# Altium PCB PCB.PcbDoc (part 1 of 2)
Units mil, origin at the board's own origin, x right, y up, seen from the top; angles counter-clockwise.
Board outline 1268 x 1338 mil, 4 copper layers (Top Layer, GND, POWER, Bottom Layer), stack 45.84 mil thick; 109 components, 101 nets, 461 pads, 146 vias.
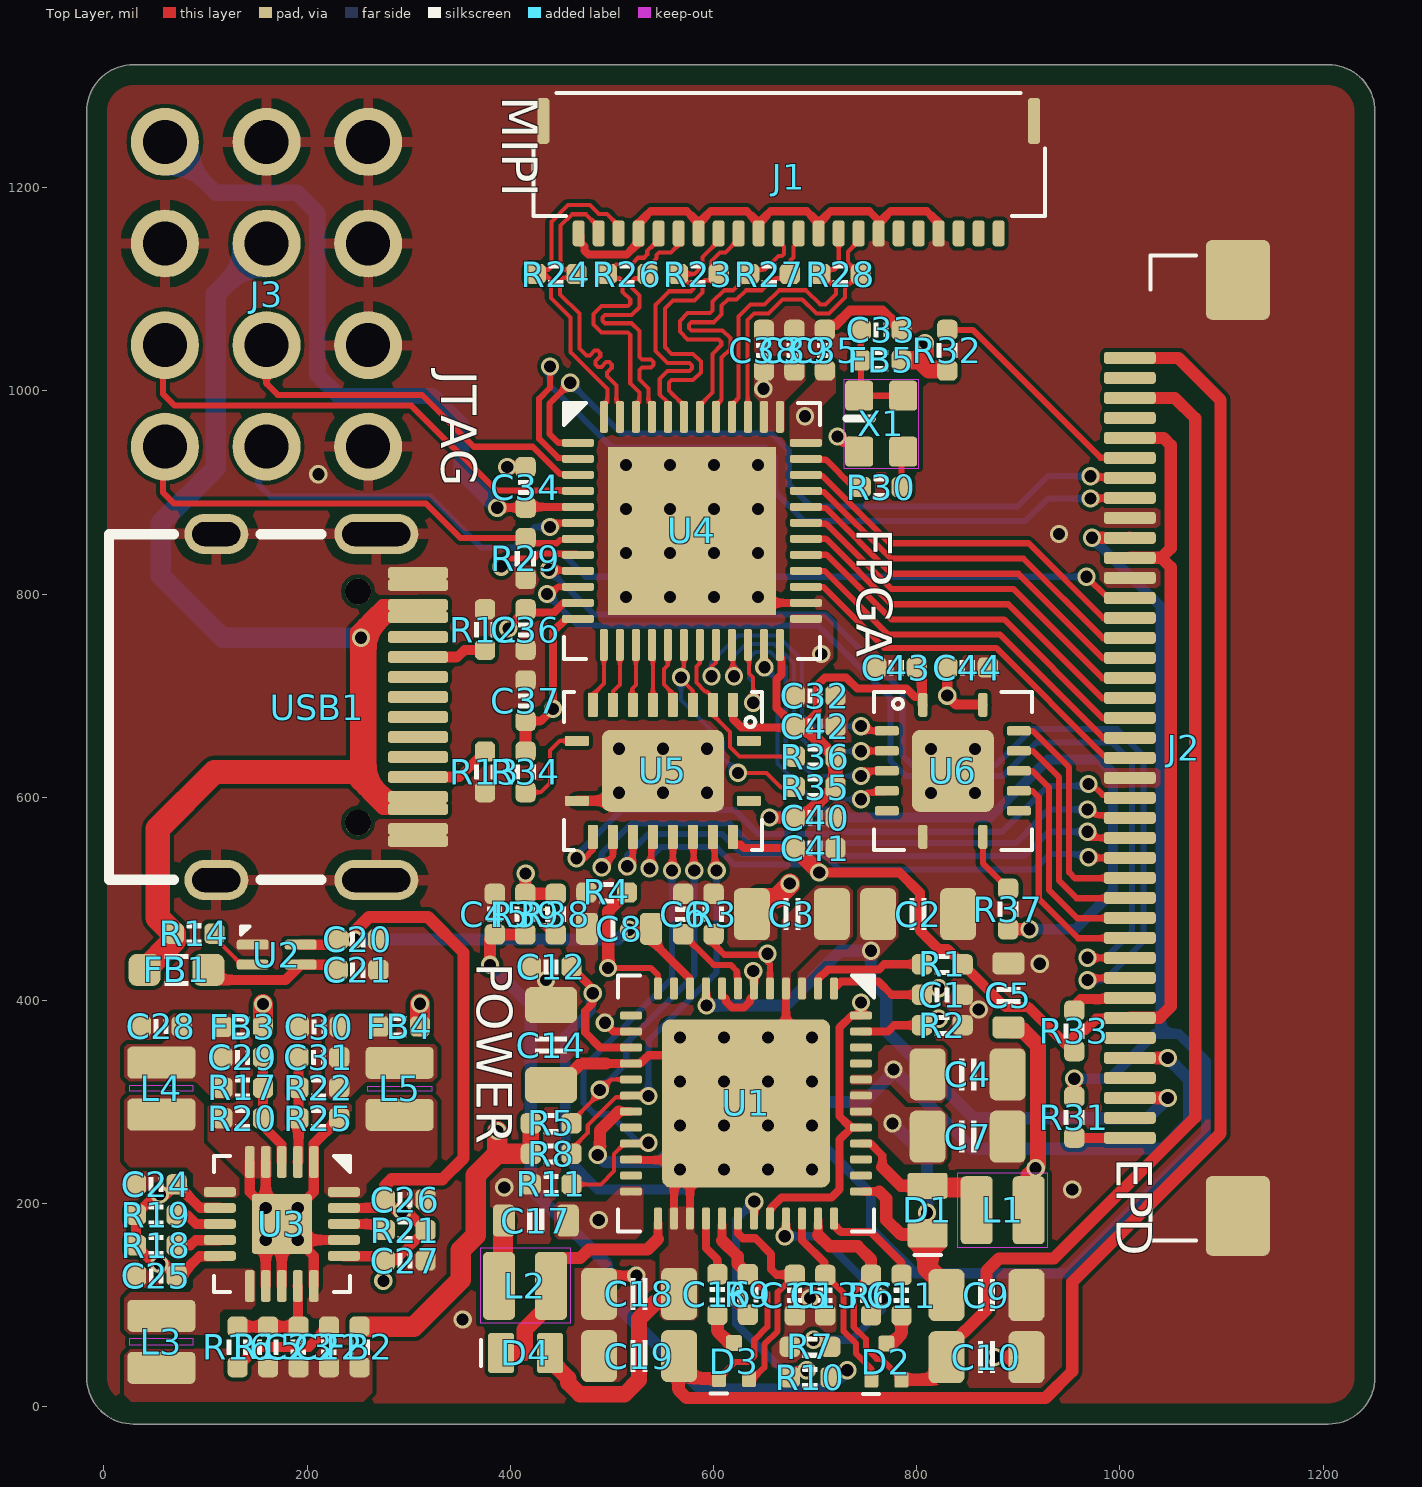
[diagram p0: Top Layer view]
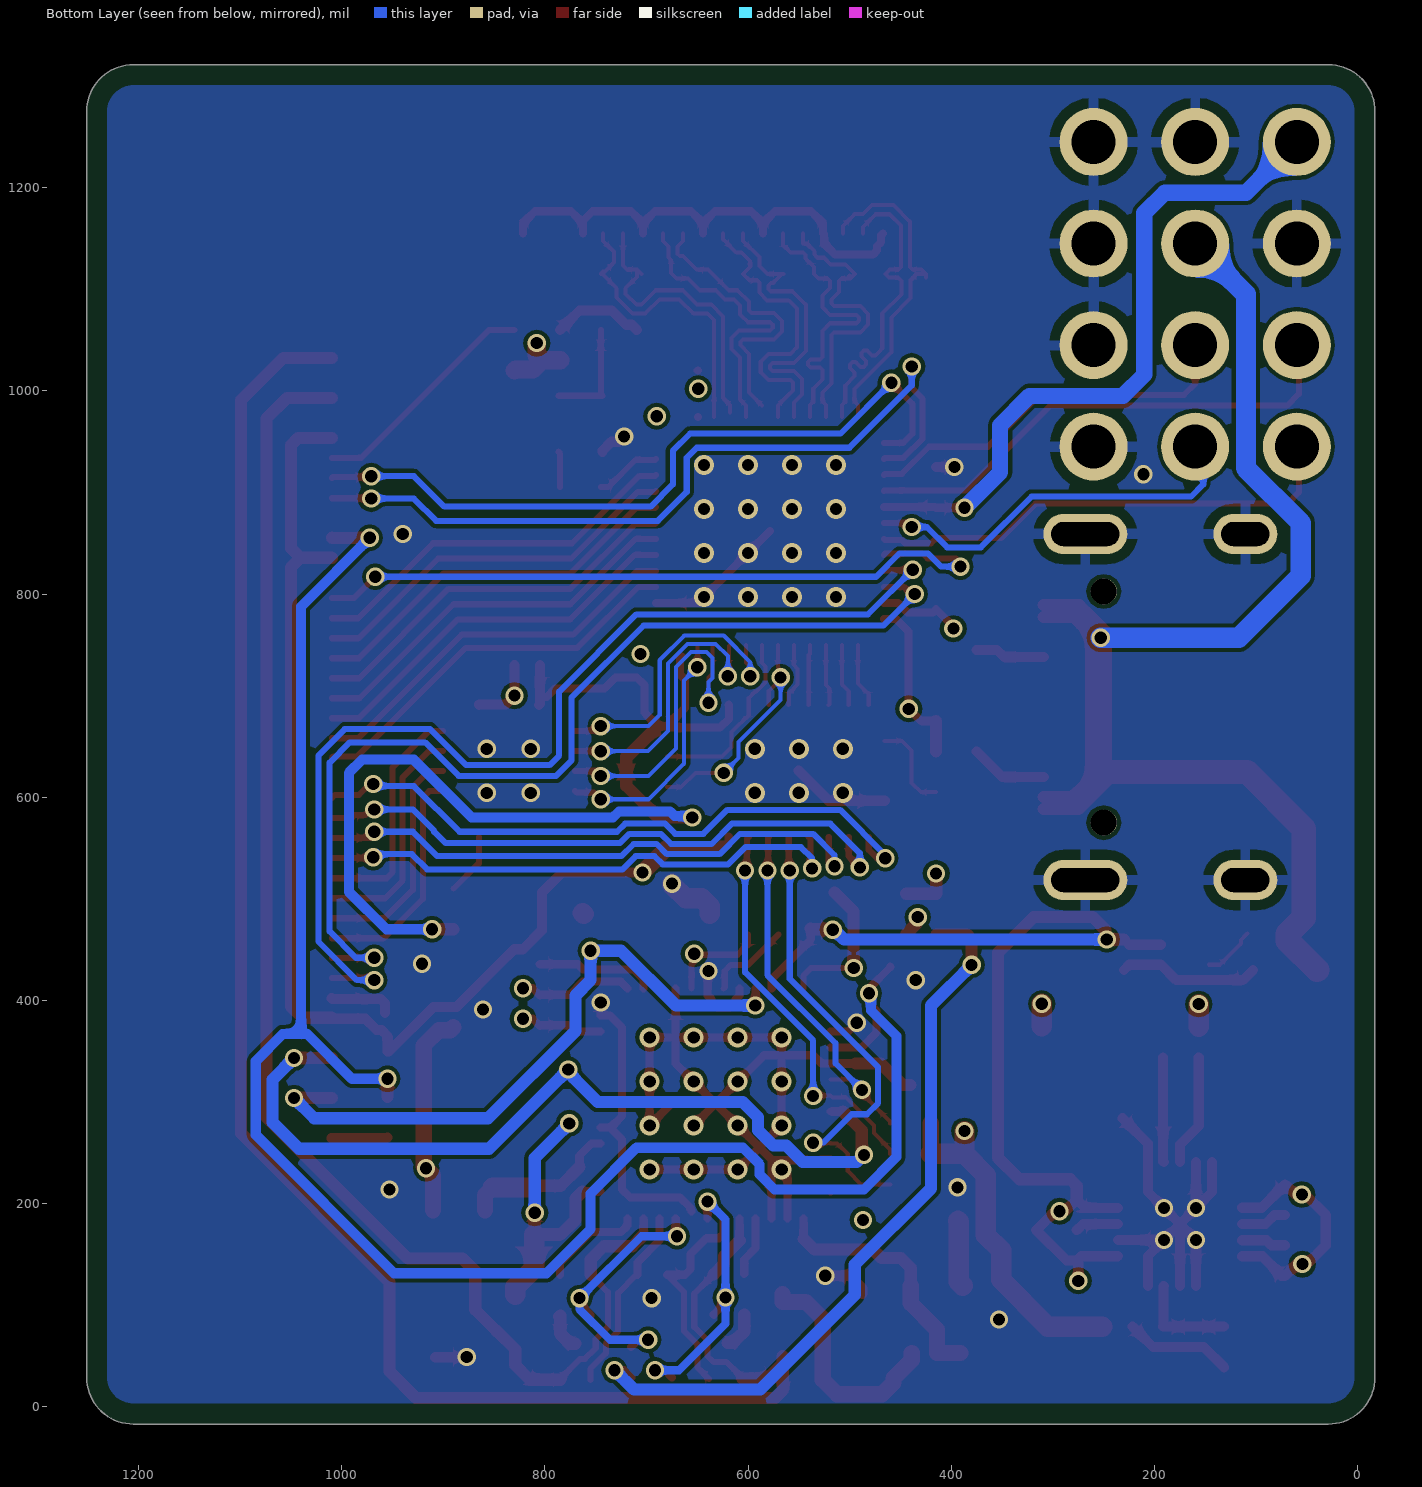
[diagram p1: Bottom Layer view, seen from below]
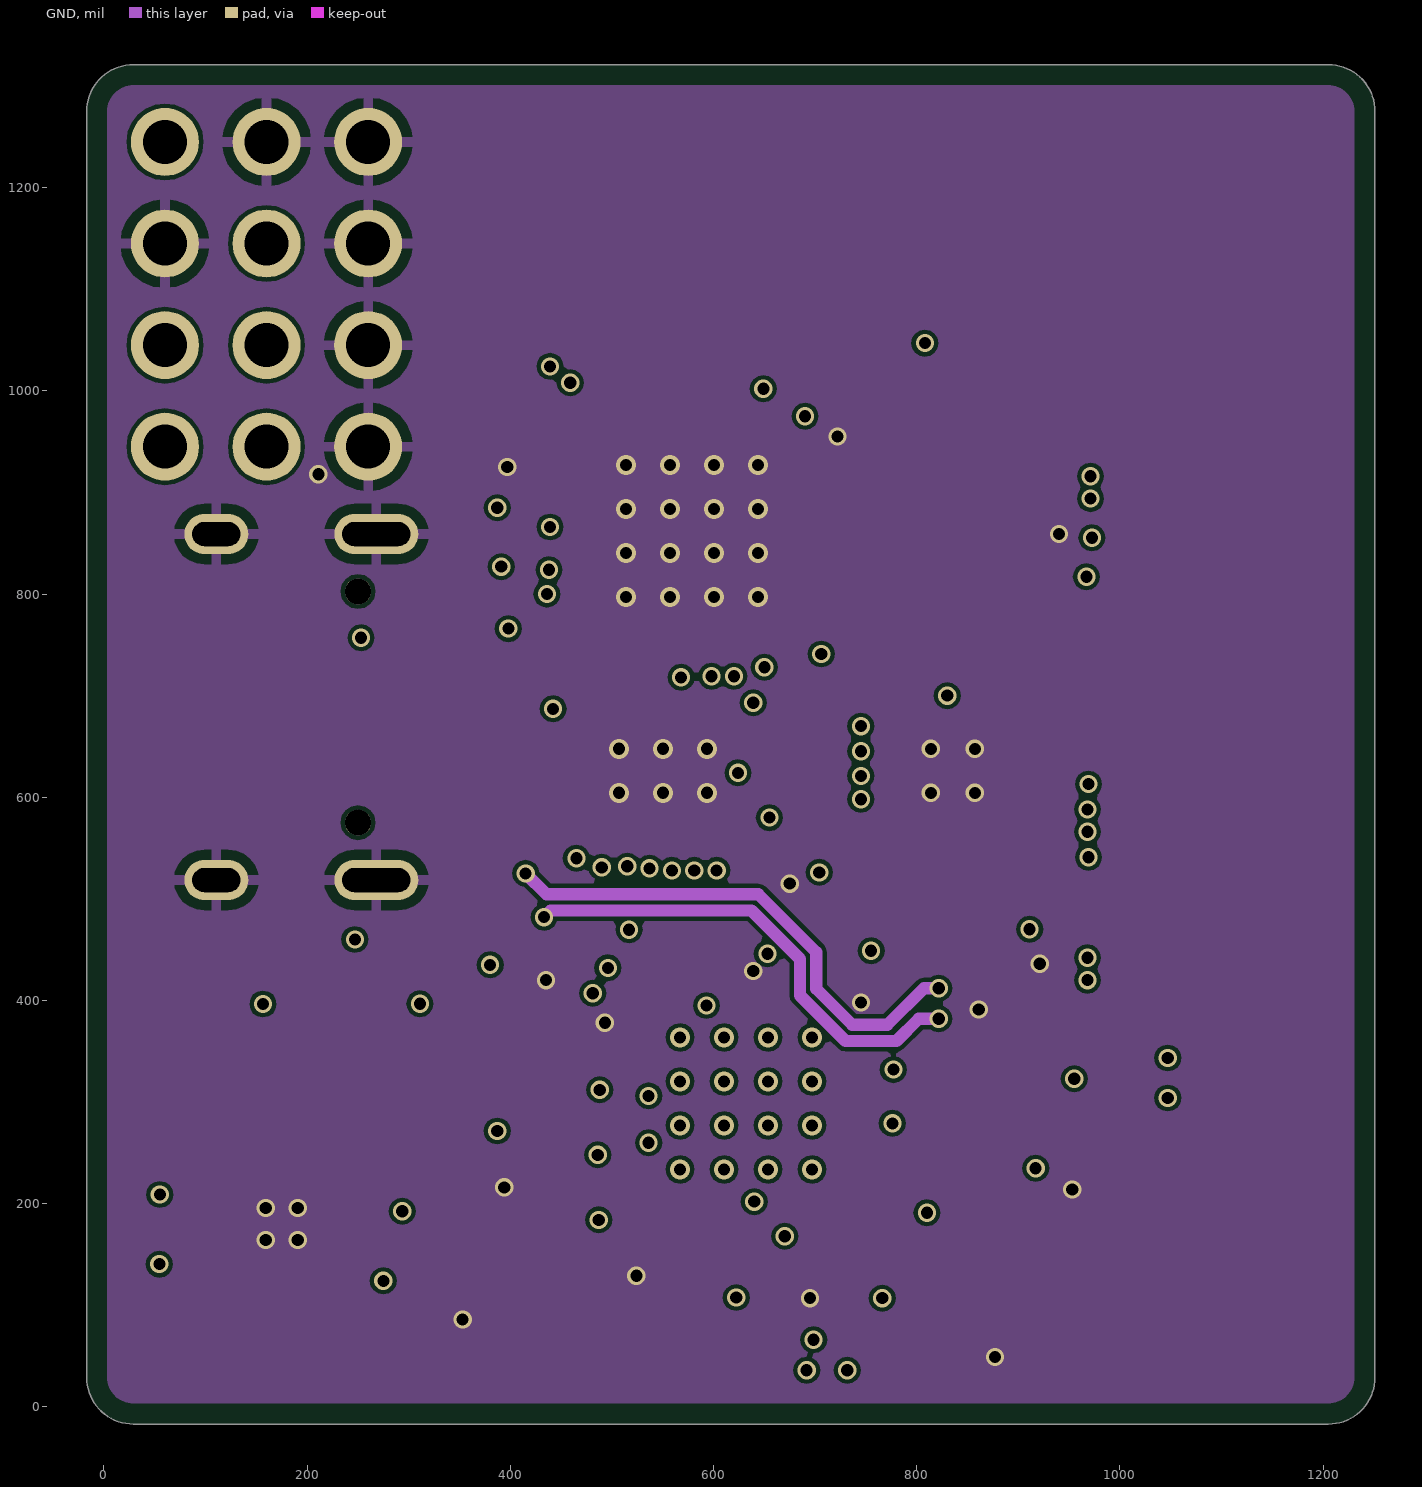
[diagram p2: GND]
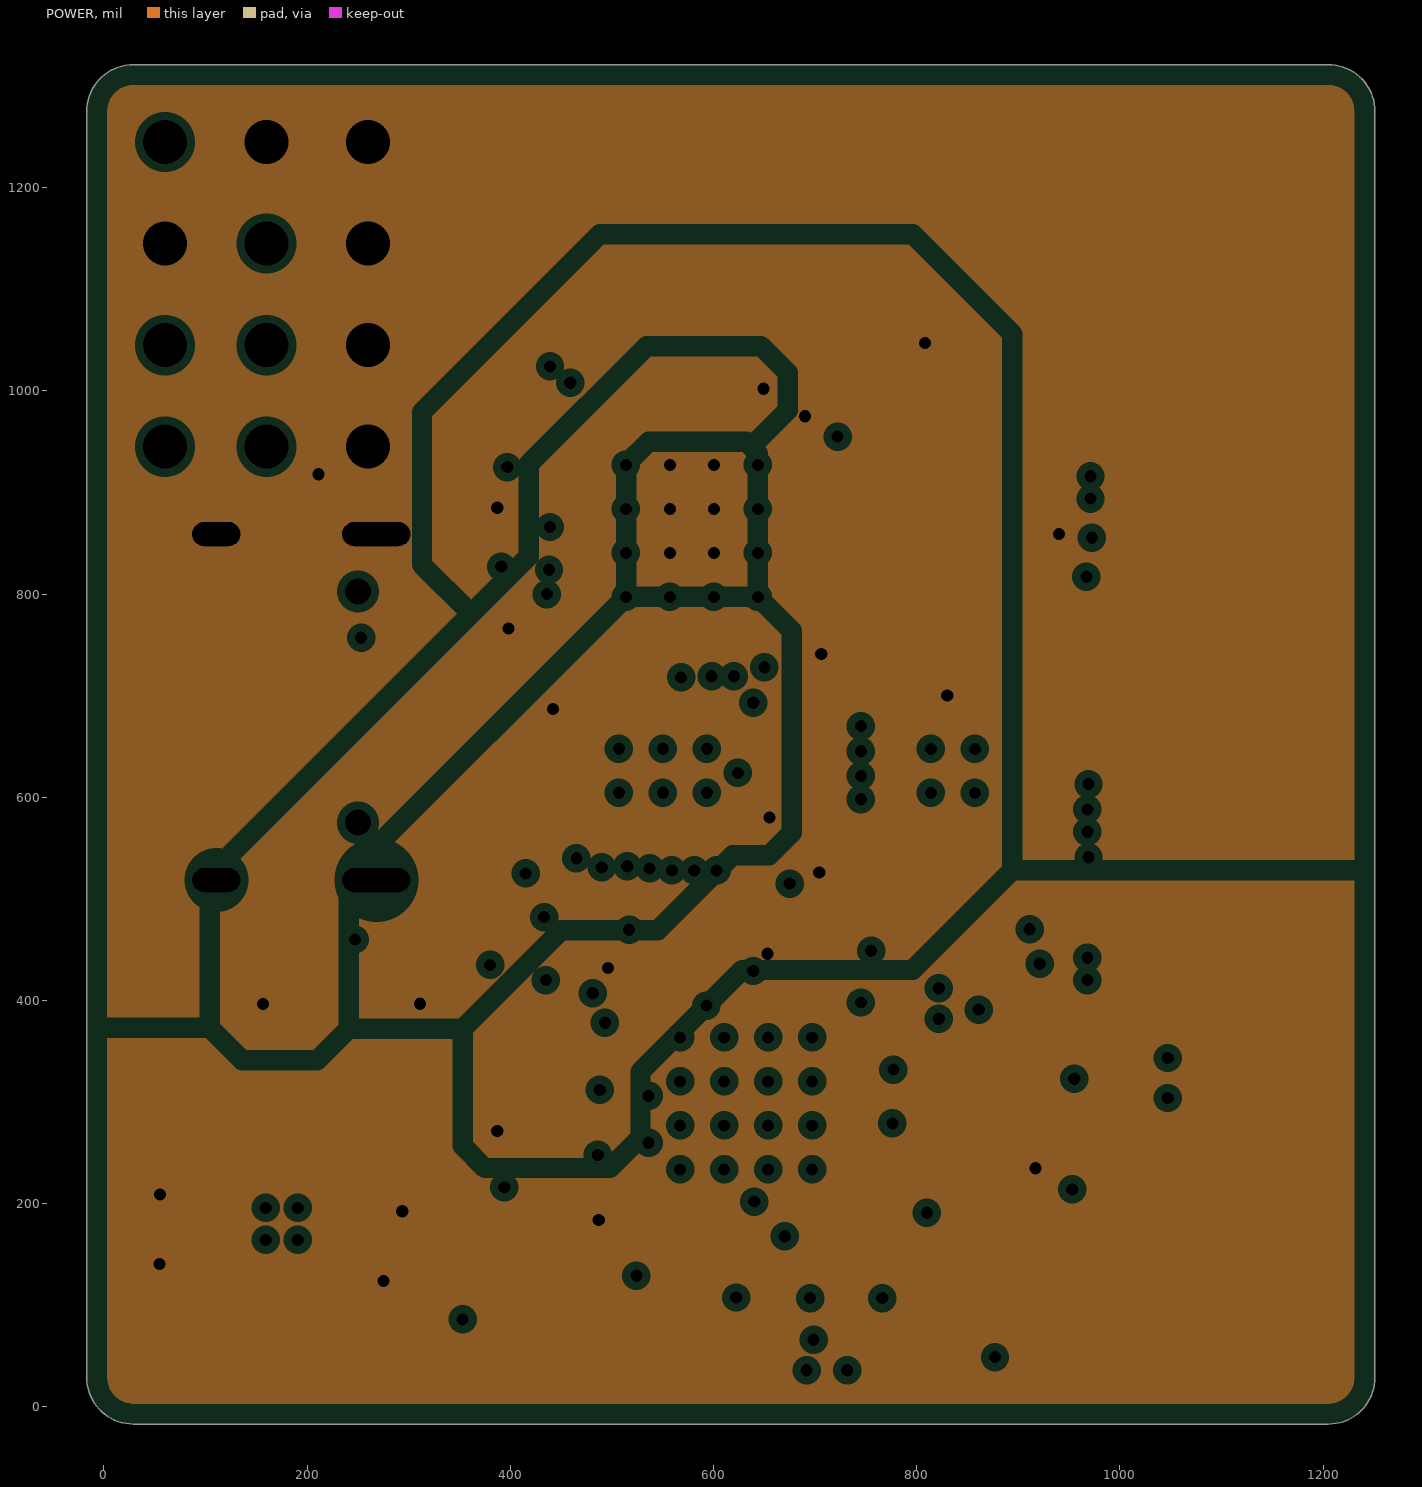
[diagram p3: POWER, clearances drawn from the general rule]
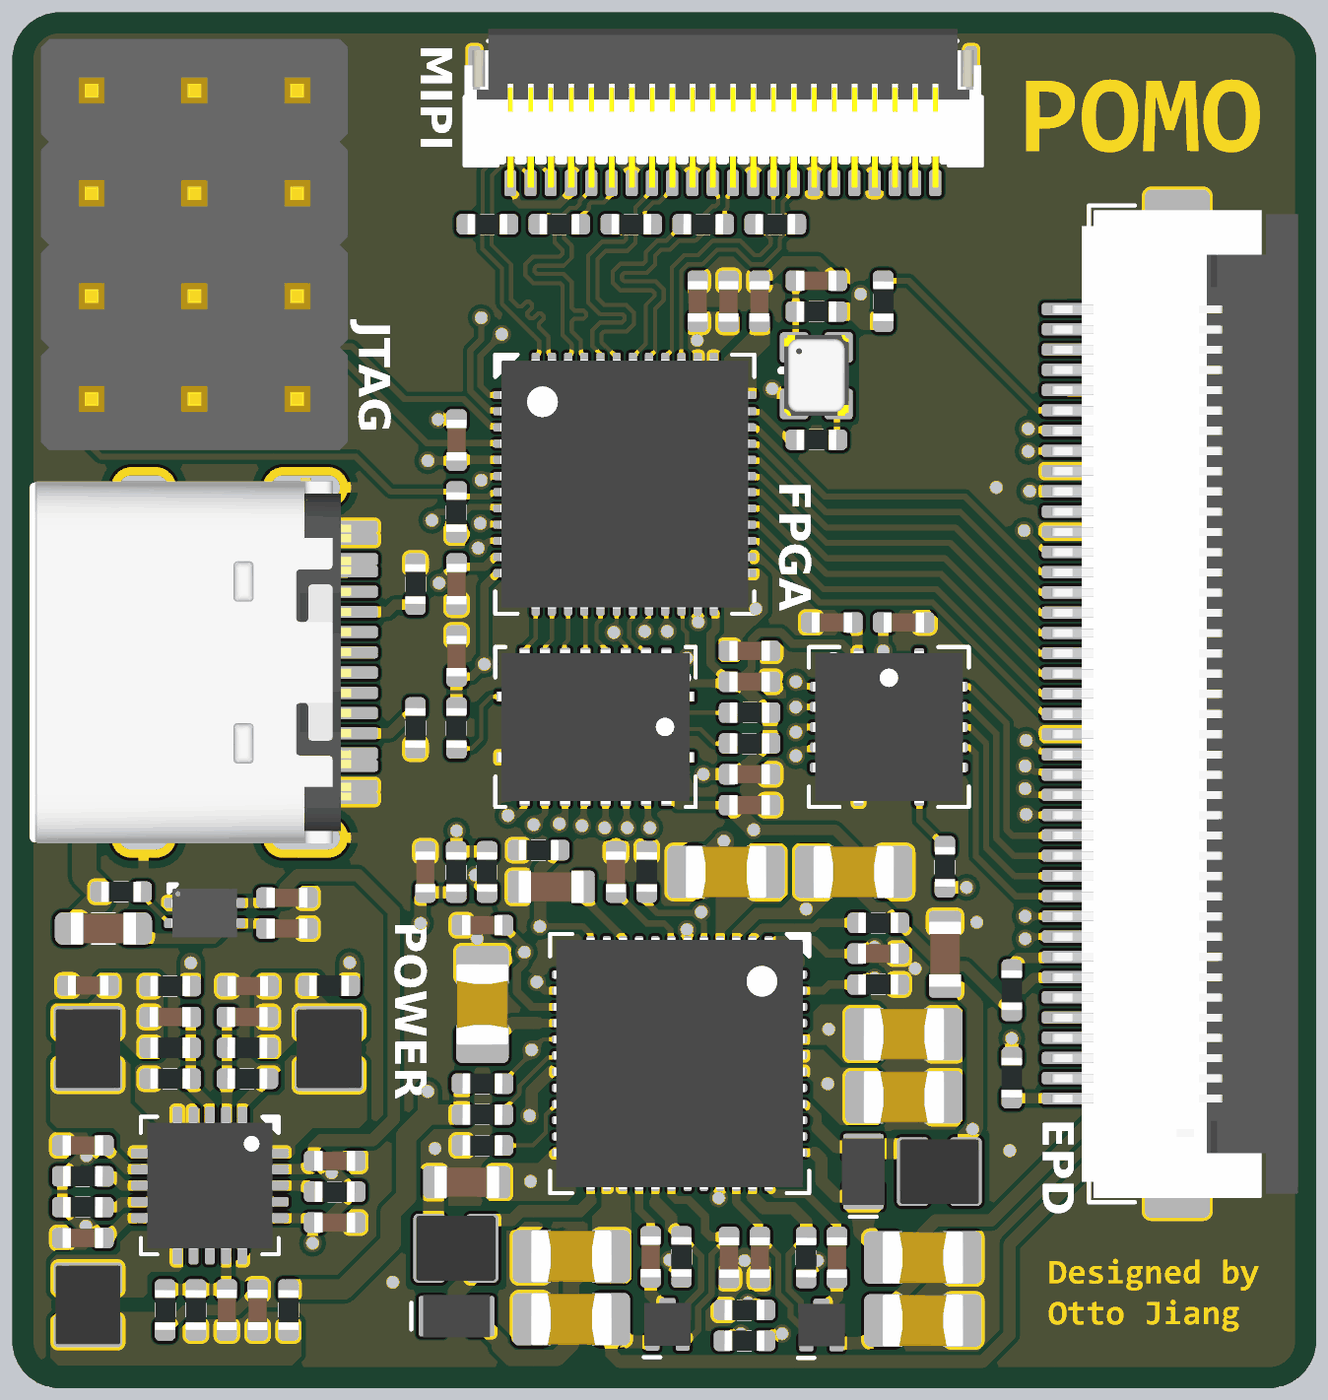
[diagram p5: 3D render of the assembled board from above, using the file's embedded part models]

## Layer stack, top to bottom
Top Solder: solder mask 0.4, Solder Resist, Dk 3.5
Top Layer: signal copper 1.3798
Dielectric 2: prepreg 3.91, PP-006, Dk 4.1
GND: signal copper 0.6
Dielectric 1: dielectric 34.06, FR-4, Dk 4.8
POWER: plane copper 0.6, net (Multiple Nets)
Dielectric 3: prepreg 3.91, PP-006, Dk 4.1
Bottom Layer: signal copper 1.3798
Bottom Solder: solder mask 0.4, Solder Resist, Dk 3.5

## Board outline
-17,29 ccw(c29,29) 29,-17 1205,-17 ccw(c1205,29) 1251,29 1251,1275 ccw(c1205,1275) 1205,1321 29,1321 ccw(c29,1275) -17,1275

## Design rules (kind name [scope] priority, off if disabled: settings)
BoardOutlineClearance [All] p1: gap=4 ignorepadtopadclearanceinfootprint=FALSE except(0: Track-OutlineEdge Track-CavityEdge Track-CutoutEdge Track-SplitBarrior Track-SplitContinuation Text-OutlineEdge Text-CavityEdge Text-CutoutEdge Text-SplitBarrior Text-SplitContinuation; 20: Poly-OutlineEdge)
Clearance [All] p1: gap=4 ignorepadtopadclearanceinfootprint=FALSE
ComponentClearance [All] p1: gap=4 collisioncheckmode=3 verticalgap=0 showdistances=FALSE
DiffPairsRouting MIPI [InDifferentialPairClass('All Differential Pairs')] p1: maxlimit=7 minlimit=5 mostfreqgap=5 toplayer_minwidth=4 toplayer_maxwidth=4 toplayer_prefwidth=4 midlayer1_minwidth=4 midlayer1_maxwidth=4 midlayer1_prefwidth=4 bottomlayer_minwidth=4 bottomlayer_maxwidth=4 bottomlayer_prefwidth=4 maxuncoupledlength=500
FanoutControl Fanout_BGA [All] p1: bgadir=Out bgaviamode=Centered fanoutstyle=Auto fanoutdirection=Alternating viagrid=1 // Fanout_BGA (Default Rule)
HoleSize [All] p1: absolutevalues=TRUE maxlimit=10000 minlimit=12 maxpercent=80.000 minpercent=20.000
MatchedLengths MatchedLengths_ADDR [InNetClass('LPDDR4-ADDR')] p1 off: tolerance=10 checknetsindiffpair=FALSE checkdiffpairvsdiffpair=TRUE checkxsignals=TRUE checkothers=TRUE
MatchedLengths MatchedLengths_A_HIGH [InNetClass('LPDDR4-A-D8-D15')] p2 off: tolerance=10 checknetsindiffpair=FALSE checkdiffpairvsdiffpair=TRUE checkxsignals=TRUE checkothers=TRUE
MatchedLengths MatchedLengths_A_LOW [InNetClass('LPDDR4-A-D0-D7')] p3 off: tolerance=10 checknetsindiffpair=FALSE checkdiffpairvsdiffpair=TRUE checkxsignals=TRUE checkothers=TRUE
MatchedLengths MatchedLengths_B_HIGH [InNetClass('LPDDR4-B-D8-D15')] p4 off: tolerance=10 checknetsindiffpair=FALSE checkdiffpairvsdiffpair=TRUE checkxsignals=TRUE checkothers=TRUE
MatchedLengths MatchedLengths_B_LOW [InNetClass('LPDDR4-B-D0-D7')] p5 off: tolerance=10 checknetsindiffpair=FALSE checkdiffpairvsdiffpair=TRUE checkxsignals=TRUE checkothers=TRUE
MatchedLengths MatchedLengths_EMMC [InNetClass('EMMC')] p6 off: tolerance=50 checknetsindiffpair=FALSE checkdiffpairvsdiffpair=TRUE checkxsignals=TRUE checkothers=TRUE
MatchedLengths MatchedLengths_SD [InNetClass('SD')] p7 off: tolerance=50 checknetsindiffpair=FALSE checkdiffpairvsdiffpair=TRUE checkxsignals=TRUE checkothers=TRUE
MatchedLengths MatchedLengths_WIFI [InNetClass('WIFI-SDC')] p8 off: tolerance=50 checknetsindiffpair=FALSE checkdiffpairvsdiffpair=TRUE checkxsignals=TRUE checkothers=TRUE
MatchedLengths MatchedLengths_TF [InNetClass('TF')] p9 off: tolerance=50 checknetsindiffpair=FALSE checkdiffpairvsdiffpair=TRUE checkxsignals=TRUE checkothers=TRUE
MinimumSolderMaskSliver [All] p1 off: minsoldermaskwidth=2
PlaneClearance [All] p1: clearance=8
PlaneConnect [All] p1: planeconnectstyle=Direct reliefexpansion=20 reliefentries=4 reliefconductorwidth=10 reliefairgap=10
PolygonConnect [All] p1: thpad.connectstyle=Relief thpad.reliefconductorwidth=10 thpad.reliefentries=4 thpad.polygonreliefangle="90 Angle" thpad.airgapwidth=10 smdpad.connectstyle=Direct smdpad.reliefconductorwidth=10 smdpad.reliefentries=4 smdpad.polygonreliefangle="90 Angle" smdpad.airgapwidth=10 via.connectstyle=Direct via.reliefconductorwidth=10 via.reliefentries=4 via.polygonreliefangle="90 Angle" via.airgapwidth=10
RoutingVias [All] p1: holewidth=12 width=18 viastyle="Through Hole" minholewidth=12 minwidth=18 maxholewidth=28 maxwidth=50
SilkToSilkClearance [All] p1: silktosilkclearance=0
SilkToSolderMaskClearance [IsPad] p1: minsilkscreentomaskgap=0 clearancetoexposedcopper=TRUE
SolderMaskExpansion [All] p1: expansion=3
Width EPD_HV [(InNet('VPOS') OR InNet('VNEG') OR InNet('VGH') OR InNet('VGL') OR InNet('VCOM') OR InNet('VB_OUT') OR InNet('VN_OUT'))] p1: maxlimit=30 minlimit=6 preferedwidth=10
Width Power_3V3_1V8_1V2 [(InNet('VCC_3V3') OR InNet('VCC_1V8') OR InNet('VCC_1V2'))] p2: maxlimit=30 minlimit=6 preferedwidth=10
Width Power_5V [(InNet('VBUS') OR InNet('VIN'))] p3: maxlimit=40 minlimit=8 preferedwidth=15
Width GND [(InNet('AGND') OR InNet('GND'))] p4: maxlimit=50 minlimit=4 preferedwidth=6
Width [All] p5: maxlimit=10000 minlimit=4 preferedwidth=4
21 further rules are at their usual default settings.

## Classes and differential pairs
differential pair MIPI_D3: +MIPI_D3_P -MIPI_D3_N
differential pair MIPI_D2: +MIPI_D2_P -MIPI_D2_N
differential pair MIPI_D1: +MIPI_D1_P -MIPI_D1_N
differential pair MIPI_D0: +MIPI_D0_P -MIPI_D0_N
differential pair MIPI_CLK: +MIPI_CLK_P -MIPI_CLK_N

## Components (designator, comment, footprint, x,y, rotation, side; value= is the part's Value field where it differs from the comment)
C1 "4.7uF/NC" Capacitor-0402 825.14,405.6 r180 top
C2 "4.7uF" Capacitor-0805 801.27,485 r180 top
C3 "4.7uF" Capacitor-0805 677.1,485 r0 top
C4 "4.7uF" Capacitor-0805 850.14,327.16 r0 top
C5 "10uF" Capacitor-0603 890.14,405.07 r90 top
C6 "4.7uF" Capacitor-0402 570,485 r270 top
C7 "4.7uF" Capacitor-0805 850.14,265.98 r0 top
C8 "10uF" Capacitor-0603 507,470.5 r0 top
C9 "4.7uF" Capacitor-0805 868.59,110 r0 top
C10 "4.7uF" Capacitor-0805 868.59,48.82 r0 top
C11 "10nF/47nF" Capacitor-0402 785,110 r270 top
C12 "4.7uF" Capacitor-0402 440.14,433.22 r0 top
C13 "100nF/1uF" Capacitor-0402 710,110 r270 top
C14 "4.7uF" Capacitor-0805 440.14,356.13 r270 top
C15 "100nF/1uF" Capacitor-0402 679.99,110 r270 top
C16 "10nF/47nF" Capacitor-0402 603.78,110.6 r270 top
C17 "10uF" Capacitor-0603 425,183.27 r0 top
C18 "4.7uF" Capacitor-0805 526.69,111.18 r0 top
C19 "4.7uF" Capacitor-0805 526.69,50 r0 top
C20 "10uF" Capacitor-0402 250,460 r0 top
C21 "10uF" Capacitor-0402 250,430 r180 top
C22 "10uF" Capacitor-0402 221.53,58.98 r270 top
C23 "220pF" Capacitor-0402 191.52,58.98 r270 top
C24 "1uF" Capacitor-0402 51.5,219 r0 top
C25 "10uF" Capacitor-0402 51.5,128.98 r0 top
C26 "10uF" Capacitor-0402 296.5,203.99 r180 top
C27 "10uF" Capacitor-0402 296.5,143.98 r180 top
C28 "10uF" Capacitor-0402 56.5,374.57 r0 top
C29 "220pF" Capacitor-0402 136.5,344 r180 top
C30 "10uF" Capacitor-0402 212,374.01 r0 top
C31 "220pF" Capacitor-0402 211.5,344 r0 top
C32 "100nF" Capacitor-0402 700,700.03 r0 top
C33 "100nF" Capacitor-0402 765,1060 r0 top
C34 "100nF" Capacitor-0402 415,905 r270 top
C35 "100nF" Capacitor-0402 709.56,1040 r90 top
C36 "4.7uF" Capacitor-0402 415,764.99 r90 top
C37 "100nF" Capacitor-0402 415,694.99 r270 top
C38 "4.7uF" Capacitor-0402 649.54,1040 r270 top
C39 "100nF" Capacitor-0402 679.55,1040 r270 top
C40 "100nF" Capacitor-0402 700,580 r180 top
C41 "100nF" Capacitor-0402 700,550 r180 top
C42 "100nF" Capacitor-0402 700,670.02 r0 top
C43 "100nF" Capacitor-0402 780,727.62 r180 top
C44 "100nF" Capacitor-0402 850,727.62 r180 top
C45 "0R/100nF" Capacitor-0402 384.66,485 r270 top
D1 "MS2A40LDF" MS2A40LDF-DFN-2_1.6x1.0mm 810.61,193.58 r90 top
D2 "BAV99QA/1SS362FV" BAV99QA-DFN-3_1.1x1.0mm 770,44.4 r90 top
D3 "BAV99QA/1SS362FV" BAV99QA-DFN-3_1.1x1.0mm 620.15,45 r90 top
D4 "MS2A40LDF" MS2A40LDF-DFN-2_1.6x1.0mm 415,52.99 r0 top
FB1 "600Ω@100MHz" "Ferrite Bead-0603" 71.5,430 r180 top
FB2 "120Ω@100MHz" "Ferrite Bead-0402" 251.54,58.98 r270 top
FB3 "120Ω@100MHz" "Ferrite Bead-0402" 136.5,374.01 r180 top
FB4 "120Ω@100MHz" "Ferrite Bead-0402" 291,374.35 r180 top
FB5 "120Ω@100MHz" "Ferrite Bead-0402" 765,1029.99 r0 top
J1 "FPC-22P-0.5mm" HC-FPC-05-10-22RLTAG 673.95,1265.63 r180 top
J2 "E0470A01-AF-S" E0470A01-AF-S 1116,648.56 r90 top
J3 "CONN_HDR_3X4_2.54mm" CONN_HDR_3X4_2.54mm 160,1095 r270 top
L1 "2.2uH/4.7uH" Inductor-2016 884.55,193.52 r0 top
L2 "4.7uH" Inductor-2016 414.34,119.06 r180 top
L3 "1.5uH" Inductor-2016 56.5,63.98 r90 top
L4 "1.5uH" Inductor-2016 56.5,313.22 r270 top
L5 "1.5uH" Inductor-2016 291,313 r270 top
R1 "10K/NC" Resistor-0402 825.14,435.61 r0 top
R2 "43.2K/36K" Resistor-0402 825.14,375.59 r180 top
R3 "5.1M" Resistor-0402 600.01,485 r90 top
R4 "5.1M" Resistor-0402 494.8,506.25 r180 top
R5 "4.7K/NC" Resistor-0402 440.14,279.04 r180 top
R6 "1M/442K" Resistor-0402 754.99,110 r90 top
R7 "47.5K/21K" Resistor-0402 695,59 r0 top
R8 "4.7K/NC" Resistor-0402 440.14,249.03 r180 top
R9 "1M/750K" Resistor-0402 633.79,110.6 r90 top
R10 "52.3K/59K" Resistor-0402 695,29 r180 top
R11 "5.1M" Resistor-0402 440.14,219.02 r180 top
R12 "5.1K" Resistor-0402 375,765 r90 top
R13 "5.1K" Resistor-0402 375,625 r90 top
R14 "100K" Resistor-0402 88.73,465.75 r180 top
R15 "68K 1%" Resistor-0402 161.51,58.98 r270 top
R16 "15K 1%" Resistor-0402 131.5,58.98 r270 top
R17 "100K 1%" Resistor-0402 136.5,313.99 r180 top
R18 "100K" Resistor-0402 51.5,158.98 r0 top
R19 "100K" Resistor-0402 51.5,188.99 r0 top
R20 "100K 1%" Resistor-0402 136.5,283.98 r180 top
R21 "100K" Resistor-0402 296.5,173.98 r180 top
R22 "200K 1%" Resistor-0402 211.5,313.99 r0 top
R23 "100R" Resistor-0402 585,1115 r0 top
R24 "100R" Resistor-0402 444.99,1115 r180 top
R25 "100K 1%" Resistor-0402 211.5,283.98 r0 top
R26 "100R" Resistor-0402 515,1115 r0 top
R27 "100R" Resistor-0402 655,1115 r0 top
R28 "100R" Resistor-0402 725,1115 r0 top
R29 "4.7K" Resistor-0402 415,835 r270 top
R30 "49.9R" Resistor-0402 765,905.32 r0 top
R31 "0R/NC" Resistor-0402 955,285 r270 top
R32 "10K" Resistor-0402 830,1040 r90 top
R33 "10K" Resistor-0402 955,370 r90 top
R34 "10K" Resistor-0402 415,624.99 r90 top
R35 "4.7K/NC" Resistor-0402 700,610.01 r0 top
R36 "4.7K/NC" Resistor-0402 700,640.01 r0 top
R37 "10K" Resistor-0402 890,490 r270 top
R38 "NC/7.5K" Resistor-0402 444.68,485 r270 top
R39 "NC/0R" Resistor-0402 414.67,485 r270 top
U1 "TPS65185/SY7636A" TPS65185-VQFN-48_6x6mm 631.95,298.62 r270 top
U2 "SY6283ADRC" SY6283ADRC-dfn-4_1.2x1.6mm 170,445 r0 top
U3 "EA3036CQBR" EA3036-QFN-20 175,180 r270 top
U4 "GW1NSR-LV4CQN48PC7/I6" GW1NSR-LV4CQN48P-QFN-48_6X6 578.62,862.2 r0 top
U5 "TXS0108ERGYR" TXS0108E-VQFN-20-3.5x4.5mm 550.16,626.02 r270 top
U6 "TXS0104ERGYR" TXS0104E-VQFN-14-3.5x3.5mm 835.53,625.96 r0 top
USB1 "TYPE-C" TYPE-C-16P 309.06,688.78 r270 top
X1 "27MHz" Oscillator-2016 765,967.66 r270 top

## Footprints (in the part's own frame and the unit in brackets; to place one, negate y for a bottom-side part, rotate by r counter-clockwise, add the part's x,y. Pads: shape width x height; smd on the part's side, far side on the other; paste and mask are expansions set on the pad)
BAV99QA-DFN-3_1.1x1.0mm [mm]
  rrect30% 0.4x0.35 smd mask+0.076: 1(-0.45,0.375) 2(-0.45,-0.375)
  rrect30% 0.4x0.4 smd mask+0.076: 3(0.45,0)
  silkscreen extent -0.81,0.18 -0.81,0.58, body extent -0.53,-0.58 0.53,0.58, height 0.4
Capacitor-0402 [mil]
  rrect50% 20x20 smd mask+3: 1(-20,0) 2(20,0)
  silkscreen extent -7,-7 7,7, body extent -20,-10 20,10, height 20
Capacitor-0603 [mm]
  rrect40% 0.55x0.8 smd mask+0.076: 1(-0.8,0) 2(0.8,0)
  silkscreen extent -0.21,-0.3 0.21,0.3, body extent -0.8,-0.4 0.8,0.4, height 0.8
Capacitor-0805 [mm]
  rrect35% 0.9x1.3 smd mask+0.076: 1(-1,0) 2(1,0)
  silkscreen extent -0.21,-0.4 0.21,0.4, body extent -1,-0.65 1,0.65, height 1.3
CONN_HDR_3X4_2.54mm [mm]
  round 1.7 hole 1.1 paste+0 mask+0.076: 1(-3.81,-2.54) 2(-3.81,0) 3(-3.81,2.54) 4(-1.27,-2.54) 5(-1.27,0) 6(-1.27,2.54) 7(1.27,-2.54) 8(1.27,0) 9(1.27,2.54) 10(3.81,-2.54) 11(3.81,0) 12(3.81,2.54)
  body extent -5.08,-3.79 5.08,3.79, height 8.54
E0470A01-AF-S [mm]
  rrect50% 0.3x1.3 smd mask+0.076: 1(9.75,2.7) 2(9.25,2.7) 3(8.75,2.7) 4(8.25,2.7) 5(7.75,2.7) 6(7.25,2.7) 7(6.75,2.7) 8(6.25,2.7) 9(5.75,2.7) 10(5.25,2.7) 11(4.75,2.7) 12(4.25,2.7) 13(3.75,2.7) 14(3.25,2.7) 15(2.75,2.7) 16(2.25,2.7) 17(1.75,2.7) 18(1.25,2.7) 19(0.75,2.7) 20(0.25,2.7) 21(-0.25,2.7) 22(-0.75,2.7) 23(-1.25,2.7) 24(-1.75,2.7) 25(-2.25,2.7) 26(-2.75,2.7) 27(-3.25,2.7) 28(-3.75,2.7) 29(-4.25,2.7) 30(-4.75,2.7) 31(-5.25,2.7) 32(-5.75,2.7) 33(-6.25,2.7) 34(-6.75,2.7) 35(-7.25,2.7) 36(-7.75,2.7) 37(-8.25,2.7) 38(-8.75,2.7) 39(-9.25,2.7) 40(-9.75,2.7)
  rrect20% 2x1.6 smd mask+0.076: 41(11.7,0) 42(-11.7,0)
  silkscreen extent -12.31,1.05 12.31,2.18, body extent -12.2,-2.98 12.2,3.12, height 2.02
EA3036-QFN-20 [mm] "QFN-20"
  rrect50% 0.8x0.24 smd mask+0.076: 1(-1.55,0.8) 2(-1.55,0.4) 3(-1.55,0) 4(-1.55,-0.4) 5(-1.55,-0.8) 11(1.55,-0.8) 12(1.55,-0.4) 13(1.55,0) 14(1.55,0.4) 15(1.55,0.8)
  rrect50% 0.24x0.8 smd mask+0.076: 6(-0.8,-1.55) 7(-0.4,-1.55) 8(0,-1.55) 9(0.4,-1.55) 10(0.8,-1.55) 16(0.8,1.55) 17(0.4,1.55) 18(0,1.55) 19(-0.4,1.55) 20(-0.8,1.55)
  rrect10% 1.5x1.5 smd mask+0.076: 21(0,0)
  silkscreen extent -1.7,-1.7 1.7,1.7, body extent -1.56,-1.56 1.56,1.56, height 0.8
"Ferrite Bead-0402" [mil]
  rrect50% 20x20 smd mask+3: 1(-20,0) 2(20,0)
  silkscreen extent -7,-10 7,10, body extent -20,-10 20,10, height 263
"Ferrite Bead-0603" [mm]
  rrect50% 0.8x0.8 smd mask+0.076: 1(-0.8,0) 2(0.8,0)
  silkscreen extent -0.3,-0.4 0.3,0.4, body extent -0.8,-0.4 0.8,0.4, height 0.8
GW1NSR-LV4CQN48P-QFN-48_6X6 [mm]
  rrect50% 0.8x0.2 smd mask+0.076: 1(-2.85,2.2) 2(-2.85,1.8) 3(-2.85,1.4) 4(-2.85,1) 5(-2.85,0.6) 6(-2.85,0.2) 7(-2.85,-0.2) 8(-2.85,-0.6) 9(-2.85,-1) 10(-2.85,-1.4) 11(-2.85,-1.8) 12(-2.85,-2.2) 25(2.85,-2.2) 26(2.85,-1.8) 27(2.85,-1.4) 28(2.85,-1) 29(2.85,-0.6) 30(2.85,-0.2) 31(2.85,0.2) 32(2.85,0.6) 33(2.85,1) 34(2.85,1.4) 35(2.85,1.8) 36(2.85,2.2)
  rrect50% 0.2x0.8 smd mask+0.076: 13(-2.2,-2.85) 14(-1.8,-2.85) 15(-1.4,-2.85) 16(-1,-2.85) 17(-0.6,-2.85) 18(-0.2,-2.85) 19(0.2,-2.85) 20(0.6,-2.85) 21(1,-2.85) 22(1.4,-2.85) 23(1.8,-2.85) 24(2.2,-2.85) 37(2.2,2.85) 38(1.8,2.85) 39(1.4,2.85) 40(1,2.85) 41(0.6,2.85) 42(0.2,2.85) 43(-0.2,2.85) 44(-0.6,2.85) 45(-1,2.85) 46(-1.4,2.85) 47(-1.8,2.85) 48(-2.2,2.85)
  rect 4.2x4.2 smd mask+0.076: 49(0,0)
  silkscreen extent -3.2,-3.2 3.2,3.2, body extent -3.07,-3.07 3.07,3.07, height 0.85
HC-FPC-05-10-22RLTAG [mm] "FPC-22P-0.5mm"
  rrect50% 0.3x0.65 smd mask+0.076: 1(-5.25,2.81) 2(-4.75,2.81) 3(-4.25,2.81) 4(-3.75,2.81) 5(-3.25,2.81) 6(-2.75,2.81) 7(-2.25,2.81) 8(-1.75,2.81) 9(-1.25,2.81) 10(-0.75,2.81) 11(-0.25,2.81) 12(0.25,2.81) 13(0.75,2.81) 14(1.25,2.81) 15(1.75,2.81) 16(2.25,2.81) 17(2.75,2.81) 18(3.25,2.81) 19(3.75,2.81) 20(4.25,2.81) 21(4.75,2.81) 22(5.25,2.81)
  rrect50% 0.3x1.15 smd mask+0.076: 23(-6.135,0) 24(6.135,0)
  silkscreen extent -6.4,-0.7 6.38,2.37, body extent -6.39,-1 6.38,2.92, height 1.01
Inductor-2016 [mm]
  rrect30% 0.8x1.7 smd mask+0.076: 1(-0.65,0) 2(0.65,0)
  body extent -0.97,-0.8 0.98,0.8, height 1
MS2A40LDF-DFN-2_1.6x1.0mm [mm]
  rrect20% 0.65x1 smd mask+0.076: 1(-0.61,0) 2(0.61,0)
  silkscreen extent -1.12,-0.33 -1.12,0.33, body extent -0.82,-0.53 0.82,0.53, height 0.5
Oscillator-2016 [mm]
  rrect25% 0.75x0.7 smd mask+0.076: 1(-0.7,-0.55) 2(0.7,-0.55) 3(0.7,0.55) 4(-0.7,0.55)
  silkscreen extent -0.13,-0.86 -0.13,-0.23, body extent -1,-0.8 1,0.8, height 0.66
Resistor-0402 [mil]
  rrect50% 20x20 smd mask+3: 1(-20,0) 2(20,0)
  silkscreen extent -7,-10 7,10, body extent -20,-10 20,10, height 263
SY6283ADRC-dfn-4_1.2x1.6mm [mm]
  rrect50% 0.8x0.25 smd mask+0.076: 1(-0.6,0.25) 2(-0.6,-0.25) 3(0.6,-0.25) 4(0.6,0.25)
  silkscreen extent -0.89,0.51 -0.69,0.71, body extent -0.81,-0.6 0.81,0.6, height 0.56
TPS65185-VQFN-48_6x6mm [mm]
  rrect50% 0.55x0.2 smd mask+0.076: 1(-2.875,2.2) 2(-2.875,1.8) 3(-2.875,1.4) 4(-2.875,1) 5(-2.875,0.6) 6(-2.875,0.2) 7(-2.875,-0.2) 8(-2.875,-0.6) 9(-2.875,-1) 10(-2.875,-1.4) 11(-2.875,-1.8) 12(-2.875,-2.2) 25(2.875,-2.2) 26(2.875,-1.8) 27(2.875,-1.4) 28(2.875,-1) 29(2.875,-0.6) 30(2.875,-0.2) 31(2.875,0.2) 32(2.875,0.6) 33(2.875,1) 34(2.875,1.4) 35(2.875,1.8) 36(2.875,2.2)
  rrect50% 0.2x0.55 smd mask+0.076: 13(-2.2,-2.875) 14(-1.8,-2.875) 15(-1.4,-2.875) 16(-1,-2.875) 17(-0.6,-2.875) 18(-0.2,-2.875) 19(0.2,-2.875) 20(0.6,-2.875) 21(1,-2.875) 22(1.4,-2.875) 23(1.8,-2.875) 24(2.2,-2.875) 37(2.2,2.875) 38(1.8,2.875) 39(1.4,2.875) 40(1,2.875) 41(0.6,2.875) 42(0.2,2.875) 43(-0.2,2.875) 44(-0.6,2.875) 45(-1,2.875) 46(-1.4,2.875) 47(-1.8,2.875) 48(-2.2,2.875)
  rrect10% 4.2x4.2 smd mask+0.076: 49(0,0)
  silkscreen extent -3.2,-3.2 3.2,3.2, body extent -3.1,-3.1 3.1,3.1, height 1
TXS0104E-VQFN-14-3.5x3.5mm [mm] "QFN, 14-Leads, Body 3.50x3.50mm, Pitch 1.50mm/0.50mm, Thermal Pad 2.05x2.05mm, IPC High Density"
  rrect50% 0.24x0.6 smd paste+0 mask+0.076: 1(-0.75,1.65) 7(-0.75,-1.65) 8(0.75,-1.65) 14(0.75,1.65)
  rrect50% 0.6x0.24 smd paste+0 mask+0.076: 2(-1.65,1) 3(-1.65,0.5) 4(-1.65,0) 5(-1.65,-0.5) 6(-1.65,-1) 9(1.65,-1) 10(1.65,-0.5) 11(1.65,0) 12(1.65,0.5) 13(1.65,1)
  rrect20% 2.05x2.05 smd paste+0 mask+0.076: 15(0,0)
  silkscreen extent -1.97,-1.97 1.97,1.97, body extent -1.88,-1.88 1.88,1.88, height 1
TXS0108E-VQFN-20-3.5x4.5mm [mm] "QFN, 20-Leads, Body 3.50x4.50mm, Pitch 1.50mm/0.50mm, Thermal Pad 2.05x3.05mm, IPC High Density"
  rrect20% 0.25x0.6 smd mask+0.076: 1(-0.75,2.15) 10(-0.75,-2.15) 11(0.75,-2.15) 20(0.75,2.15)
  rrect20% 0.6x0.25 smd mask+0.076: 2(-1.65,1.75) 3(-1.65,1.25) 4(-1.65,0.75) 5(-1.65,0.25) 6(-1.65,-0.25) 7(-1.65,-0.75) 8(-1.65,-1.25) 9(-1.65,-1.75) 12(1.65,-1.75) 13(1.65,-1.25) 14(1.65,-0.75) 15(1.65,-0.25) 16(1.65,0.25) 17(1.65,0.75) 18(1.65,1.25) 19(1.65,1.75)
  rrect20% 2.05x3.05 smd mask+0.076: 21(0,0)
  silkscreen extent -1.97,-2.48 1.97,2.47, body extent -1.91,-2.4 1.91,2.4, height 1
TYPE-C-16P [mm] "TYPE-C 16P"
  round 0.65 hole 0.65 mask+0.076: 0(-2.89,-1.5) 0(2.89,-1.5)
  oval 1x1.6 hole 1.2 slot 0.6 at 0 deg mask+0.076: 1(4.325,-5.04) 2(-4.325,-5.04)
  oval 1x2.1 hole 1.7 slot 0.6 at 0 deg mask+0.076: 3(-4.325,-1.04) 4(4.325,-1.04)
  rrect50% 0.3x1.5 smd mask+0.076: A1(-3.35,0) A4(-2.55,0) A5(-1.25,0) A6(-0.25,0) A7(0.25,0) A8(1.25,0) A9(2.55,0) A12(3.35,0) B1(3.05,0) B4(2.25,0) B5(1.75,0) B6(0.75,0) B7(-0.75,0) B8(-1.75,0) B9(-2.25,0) B12(-3.05,0)
  silkscreen extent -4.32,-7.73 4.32,-2.41, body extent -4.47,-7.72 4.47,0.09, height 3.25

## Part data
C1 C6 C12: library part Capacitor-0402, "CL05A475MO5NUNC"
C2 C3 C4 C7 C9 C10 C14 C18 C19: library part Capacitor-0805, "CL21A475KBQNNNE"
C5 C8 C17: library part Capacitor-0603, "CL10A106KP8NNNC"
C11 C16: library part Capacitor-0402, "CL05B103KB5NNNC/CC0402KRX7R9BB473"
C13 C15: library part Capacitor-0402, "0402B104K500NT/HGC0402R5105K500NTEJ"
C20 C21 C22 C25 C26 C27 C28 C30: library part Capacitor-0402, "HGC0402R5106M100NTEJ"
C23 C29 C31: library part Capacitor-0402, "CL05C221JB5NNNC"
C24: library part Capacitor-0402, "HGC0402R5105K500NTEJ"
C32 C33 C34 C35 C37 C39 C40 C41 C42 C43 C44: library part Capacitor-0402, "100nF/X5R/25V"
C36 C38: library part Capacitor-0402, "4.7uF/X5R/10V"
C45: library part Capacitor-0402, "CL05B104KB5NNNC"
D1 D4: "Schottky Diode-DFN-1610-2"
D2 D3: library part BAV99QA
FB1: library part "Ferrite Bead-0603", "UPZ1608U601-1R3TF"
FB2 FB3 FB4 FB5: library part "Ferrite Bead-0402", "UPZ1005D121-1R3TF"
J1: "HC-FPC-05-10-22RLTAG"
J2: "AFC01-S40FCA-00"
L1: library part Inductor-2016, "FTC201612S2R2MBCA/FTC201610S4R7MBCA"
L2: library part Inductor-2016, "FTC201610S4R7MBCA"
L3 L4 L5: library part Inductor-2016, "FTC201610S1R5MBCA"
R1 R2 R3 R4 R5 R6 R7 R8 R9 R10 R11 R12 R13 R14 R15 R16 R17 R18 R19 R20 R21 R22 R23 R24 R25 R26 R27 R28 R29 R30 R31 R32 R33 R34 R35 R36 R37 R38 R39: library part Resistor-0402, "Resistor-0402"
U1: library part TPS65185
U4: library part GW1NSR-LV4CQN48P
U5: library part TXS0108E
U6: library part TXS0104E
USB1: "GT-USB-7010ASV"
X1: library part Oscillator_Source-2016, "OC7EL89CJO-113YLC-27M"

## Via types
v1: diameter 18, hole 12, Top Layer to Bottom Layer, tented both sides, 104 vias
v2: diameter 19.68, hole 12, Top Layer to Bottom Layer, 38 vias
v3: diameter 18, hole 12, Top Layer to Bottom Layer, 4 vias

## Nets (pads, with @x,y where several pads share a name; then routed paths per layer and width w, separated by ;. In a path a pad name is that pad's centre, name@x,y a point inside that pad or via, vN(x,y) a via of type N, cw(c..) or ccw(c..) an arc to the next point about the centre after c; other vN are vias at no path point)
EPD_D0: J2.14 U4.34 | length 377.4
  Top Layer w6: U4.34@690.83,917.32 691.76,916.39 706.97,916.39 773.35,850 910,850 983.78,776.22 1009.41,776.22 J2.14@1009.7,776.52
EPD_D1: J2.15 U4.33 | length 379.1
  Top Layer w6: U4.33@690.83,901.57 691.76,900.64 708.57,900.64 774.21,835 905,835 983.46,756.54 1009.41,756.54 J2.15@1009.7,756.83
EPD_D2: J2.16 U4.32 | length 380.7
  Top Layer w6: U4.32@690.83,885.83 691.76,884.89 710.18,884.89 775.07,820 900,820 983.15,736.85 1009.41,736.85 J2.16@1009.7,737.15
EPD_D3: J2.17 U4.31 | length 382.3
  Top Layer w6: U4.31@690.83,870.08 691.76,869.14 710.86,869.14 775,805 895,805 982.83,717.17 1009.41,717.17 J2.17@1009.7,717.46
EPD_D4: J2.18 U4.30 | length 384
  Top Layer w6: U4.30@690.83,854.33 710.67,854.33 775,790 890,790 982.52,697.48 1009.41,697.48 J2.18@1009.7,697.78
EPD_D5: J2.19 U4.29 | length 385.6
  Top Layer w6: U4.29@690.83,838.58 711.42,838.58 775,775 886,775 983.2,677.8 1009.41,677.8 J2.19@1009.7,678.09
EPD_D6: J2.20 U4.28 | length 387.2
  Top Layer w6: U4.28@690.83,822.83 709.17,822.83 772,760 882,760 983.89,658.11 1009.41,658.11 J2.20@1009.7,658.41
EPD_D7: J2.21 U4.27 | length 388.9
  Top Layer w6: U4.27@690.83,807.09 707.91,807.09 768,747 878,747 985,640 1007.83,640 1008.13,640.3 J2.21@1009.7,638.72
EPD_D8: J2.23 U5.12 | length 643
  Top Layer w6: v1@465,537.91 v1(465,540) 473,540 481.26,548.26 U5.12@481.26,561.06 ; v1(969,613) 972.25,613 982.99,602.26 1006.8,602.26 J2.23@1009.7,599.35
  Bottom Layer w6: v1(465,540) 465,543 509.53,587.53 620.47,587.53 644,564 671.72,564 681.72,574 721.05,574 729.05,566 884,566 929,611 967,611 v1(969,613)
EPD_D8_F: U4.13 U5.9 | length 63.5
  Top Layer w4: U5.9@481.26,690.98 481.26,701.26 492.01,712.01 U4.13@492.01,750
EPD_D9: J2.24 U5.13 | length 614.2
  Top Layer w6: v1(490,531) 501,542 501,561.01 U5.13@500.95,561.06 ; v1(968,588) 971.25,588 976.68,582.57 987.11,582.57 990.02,579.67 J2.24@1009.7,579.67
  Bottom Layer w6: v1(490,531) 490,545 519,574 616,574 636,554 675.86,554 685.86,564 716.91,564 725.91,555 898,555 909,566 909,567 930,588 v1(968,588)
EPD_D9_F: U4.14 U5.8 | length 61.8
  Top Layer w4: U5.8@500.95,690.98 500.95,703.95 507.76,710.76 U4.14@507.76,750
EPD_D10: J2.25 U5.14 | length 582.5
  Top Layer w6: v1@513,526 515,528 v1(515,532) 520.63,537.63 U5.14@520.63,561.06 ; v1(968,566) 974.02,559.98 J2.25@1009.7,559.98
  Bottom Layer w6: v1(515,532) 515,543 536,564 608,564 628,544 680.01,544 690.01,554 712.77,554 724.77,542 906,542 930,566 v1(968,566)
EPD_D10_F: U4.15 U5.7 | length 60.7
  Top Layer w4: U5.7@520.63,690.98 520,691.61 520,707 523.5,710.5 U4.15@523.5,750
EPD_D11: J2.26 U5.15 | length 547.1
  Top Layer w6: v1@538,528 537,529 v1(537,530) 538.32,530 538.66,529.66 538.66,559.41 U5.15@540.32,561.06 ; v1(969,541) 969.7,540.3 J2.26@1009.7,540.3
  Bottom Layer w6: v1(537,530) 537,540 548,551 602.63,551 619.63,534 684.15,534 692.15,542 710.63,542 723.63,529 916,529 931,544 966,544 v1(969,541)
EPD_D11_F: U4.16 U5.6 | length 59.5
  Top Layer w4: U4.16@539.25,750 539.25,741.06 540.32,740 U5.6@540.32,690.98
EPD_D12: J2.27 U6.13 | length 230
  Top Layer w6: U6.13@900.49,665.33 914.07,665.33 950,629.4 950,526 955.69,520.31 1009.41,520.31 J2.27@1009.7,520.61
EPD_D12_F: U4.20 U6.2 | length 300.4
  Top Layer w4: v1(598,719) 598,728.49 602.24,732.73 U4.20@602.24,750
  Top Layer w6: v1(745,670) 749.67,665.33 U6.2@770.57,665.33
  Bottom Layer w4: v1(598,719) 598,733 624,759 662.84,759 687,734.84 687,681 698,670 v1(745,670)
EPD_D13: J2.28 U6.12 | length 228.9
  Top Layer w6: U6.12@900.49,645.65 913.95,645.65 940,619.6 940,518 957.37,500.63 1009.41,500.63 J2.28@1009.7,500.93
EPD_D13_F: U4.21 U6.3 | length 297.5
  Top Layer w4: U4.21@617.99,750 619,749 619,720 v1(620,719)
  Top Layer w6: v1(745,645.32) 745.33,645.65 U6.3@770.57,645.65
  Bottom Layer w4: v1(620,719) 622.68,721.68 626.21,721.68 620,727.88 620,739 632,751 659.53,751 679,731.53 679,665 698.68,645.32 v1(745,645.32)
EPD_D14: J2.29 U6.11 | length 228.5
  Top Layer w6: U6.11@900.49,625.96 913.84,625.96 930,609.8 930,509 958.06,480.94 1009.41,480.94 J2.29@1009.7,481.24
EPD_D14_F: U4.22 U6.4 | length 342.5
  Top Layer w4: U4.22@633.74,750 635,748.74 635,721.79 639,717.79 v1(639,693)
  Top Layer w6: v1(745,621) 749.96,625.96 U6.4@770.57,625.96
  Bottom Layer w4: v1(639,693) 639,713.5 635,717.5 635,737 641,743 656.21,743 671,728.21 671,648 698,621 v1(745,621)
EPD_D15: J2.30 U6.10 | length 228
  Top Layer w6: U6.10@900.49,606.28 900.76,606 914,606 920,600 920,500 958.74,461.26 1009.41,461.26 J2.30@1009.7,461.56
EPD_D15_F: U4.23 U6.5 | length 249.5
  Top Layer w4: v1@649,727 v1(650,728) 649.74,728.26 649.74,749.74 U4.23@649.49,750
  Top Layer w6: v1(745,598) 751.55,604.55 768.84,604.55 U6.5@770.57,606.28
  Bottom Layer w4: v1(650,728) 663,715 663,633 698,598 v1(745,598)
EPD_GDCLK: J2.7 U4.1 | length 724.3
  Top Layer w6: v1(459,1008) 438.34,987.34 438.34,957.66 447.18,948.82 U4.1@466.42,948.82 ; v1(971,916) 971.84,915.16 1008.86,915.16 J2.7@1009.7,914.31
  Bottom Layer w6: v1(459,1008) 509,958 657,958 674,941 674,908 696,886 899,886 929,916 v1(971,916)
EPD_GDSP: J2.8 U4.2 | length 795.5
  Top Layer w6: v1(439,1024) 439,1003 428.34,992.34 428.34,952.77 447.1,934.01 465.48,934.01 U4.2@466.42,933.07 ; v1(971,894) 971.31,894.31 1009.39,894.31 J2.8@1009.7,894.63
  Bottom Layer w6: v1(439,1024) 439,1005.37 500.36,944.01 650.56,944.01 660.43,934.14 660.43,900.57 689,872 907,872 929,894 v1(971,894)
EPD_SDCE: J2.31 U4.10 | length 1004.4
  Top Layer w6: v1(436,800) 439.63,800 446.65,807.02 466.35,807.02 U4.10@466.42,807.09 ; v1(968,442) 968.06,441.94 1009.64,441.94 J2.31@1009.7,441.87
  Bottom Layer w6: v1(436,800) 467,769 703,769 774,698 774,636 789,621 885,621 918,654 992.09,654 1012,634.09 1012,468 986,442 v1(968,442)
EPD_SDCLK: J2.13 U4.8 | length 725.6
  Top Layer w6: v1(391,827) 391,829.71 395.69,834.39 395.69,835 423.38,835 428.38,840 465,840 U4.8@466.42,838.58 ; v1(967,817) 987.8,796.2 J2.13@1009.7,796.2
  Bottom Layer w6: v1(391,827) 410,827 423,840 451,840 474,817 v1(967,817)
EPD_SDLE: J2.32 U4.9 | length 1052.3
  Top Layer w6: v1(438,824) 438.58,823.42 465.83,823.42 U4.9@466.42,822.83 ; v1(968,420) 970.19,422.19 J2.32@1009.7,422.19
  Bottom Layer w6: v1(438,824) 482,780 710,780 786,704 786,641 795.39,631.61 877.61,631.61 913,667 997,667 1023,641 1023,458 985,420 v1(968,420)
GND: C1.1 C2.1 C3.1 C4.2 C5.2 C6.1 C7.2 C8.1 C9.2 C10.2 C12.1 C13.2 C14.1 C15.2 C17.1 C18.1 C19.1 C20.2 C21.1 C22.1 C24.1 C25.1 C26.1 C27.1 C28.1 C30.1 C32.2 C33.2 C34.1 C35.2 C36.1 C37.1 C38.1 C39.1 C40.1 C41.1 C42.2 C43.2 C44.1 C45.1 J1.4 J1.7 J1.10 J1.13 J1.16 J1.19 J1.22 J1.23 J1.24 J2.9 J2.12 J2.22 J2.41 J2.42 J3.2 J3.3 J3.4 J3.6 J3.9 J3.12 L2.2 R2.1 R3.2 R4.2 R7.1 R11.2 R12.2 R13.1 R16.2 R20.2 R25.2 R29.2 U1.6 U1.8 U1.14 U1.32 U1.41 U1.48 U2.1 U3.1 U3.4 U3.5 U3.12 U3.13 U3.15 U3.17 U3.21 U4.26 U4.49 U5.11 U5.21 U6.7 U6.15 USB1.1 USB1.2 USB1.3 USB1.4 USB1.A1 USB1.A12 USB1.B1 USB1.B12 X1.2 | length 2066.4
  Top Layer w8: J1.22@467.26,1155 469.17,1153.09 469.17,1146.2 473.04,1142.33 473.04,1137.96 476.8,1134.2 514.51,1134.2 525.41,1145.11 525.41,1154.09 J1.19@526.32,1155 526.32,1165.01 538.1,1176.8 573.59,1176.8 J1.16@585.37,1165.01 ; v1(493,378) 501.45,369.55 518.7,369.55 U1.14@518.76,369.49 ; U4.49@578.62,862.2 v2(600.28,840.55) v2(643.58,797.24) 649.49,791.34 U4.26@690.83,791.34 ; J1.16@585.37,1155 J1.16@585.37,1165.01 ; U1.8@608.33,411.81 608.33,405.05 612.14,401.24 612.14,398.82 617.98,392.98 630.17,392.98 636.01,398.82 636.01,401.24 639.82,405.05 U1.6@639.82,411.81 639.76,411.87 639.76,428.24 v1(639,429) ; J1.13@644.43,1155 J1.13@644.43,1165.01 ; U1.32@655.63,192.26 655.63,193.59 657,194.96 657,196.04 666.96,206 716,206 724,214 724,263.04 735.96,275 U1.41@745.14,275 ; J1.10@703.48,1155 J1.10@703.48,1165.01 ; U1.41@734.94,275.06 724,286 724,373.28 735.96,385.24 U1.48@745.14,385.24 745.14,397.86 v1(745,398) ; 761.63,1168.37 753.2,1176.8 715.26,1176.8 J1.10@703.48,1165.01 ; J1.7@762.54,1155 762.54,1165.01 774.32,1176.8 809.81,1176.8 821.59,1165.01 J1.4@821.59,1155 ; J1.16@585.37,1165.01 597.15,1176.8 632.64,1176.8 J1.13@644.43,1165.01 ; J1.13@644.43,1165.01 656.21,1176.8 691.7,1176.8 J1.10@703.48,1165.01
  Top Layer w10: R16.2@131.5,38.98 151.5,58.98 201.53,58.98 C22.1@221.53,78.98 ; U3.5@143.5,241.02 143.5,211.5 v1(159.25,195.75) ; U3.12@159.25,118.98 v1(159.25,164.25) U3.21@175,180 ; U3.4@159.25,241.02 v1(159.25,195.75) ; U3.13@175,118.98 U3.21@175,180 ; U3.15@206.5,118.98 206.5,148.5 v1(190.75,164.25) ; R25.2@231.5,283.98 206.5,258.98 U3.1@206.5,241.02 206.5,211.5 U3.21@175,180 ; U3.17@236.02,164.25 v1(190.75,164.25) ; v1(397,925) C34.1@415,925 ; U5.11@465.51,596.5 465.59,596.57 520.71,596.57 U5.21@550.16,626.02 ; C18.1@487.32,111.18 487.32,116.37 499.94,129 v1(524,129) ; C35.2@709.56,1060 714.56,1065 720.2,1065 734.2,1079 766,1079 C33.2@785,1060 ; v1(722.03,955) 722.16,955 727.3,949.86 734.57,949.86 743.35,941.08 X1.2@743.35,940.1 ; v1(877,49) 877.18,48.82 C10.2@907.96,48.82 ; v1(159.25,195.75) U3.21@175,180 ; U3.21@175,180 v1(190.75,164.25)
  Top Layer w20: L2.2@388.75,119.06 392.68,122.99 392.68,182.44 C17.1@393.5,183.27 ; C3.1@637.73,485 637.73,492.87 645.45,500.59 661.59,500.59 675,514 v1(675,515)
  other v1: 353,86 695,107 190.75,195.75 953,214 394,216 860.97,391.03 435,420 920.97,436.03 940,859 211,918
  other v2: 506.85,604.37 550.16,604.37 593.46,604.37 506.85,647.68 550.16,647.68 593.46,647.68 513.66,797.24 556.97,797.24 600.28,797.24 513.66,840.55 556.97,840.55 643.58,840.55 513.66,883.86 556.97,883.86 600.28,883.86 643.58,883.86 513.66,927.17 556.97,927.17 600.28,927.17 643.58,927.17
  other v3: 813.87,604.31 857.18,604.31 813.87,647.61 857.18,647.61
JTAG_TCK: J3.10 R29.1 U4.7 | length 476.8
  Top Layer w6: J3.10@60,945 58,943 58,900 69,889 317.05,889 351.05,855 R29.1@415,855 420,850 445.63,850 449.02,853.39 465.48,853.39 U4.7@466.42,854.33
JTAG_TDI: J3.8 U4.3 | length 381.6
  Top Layer w6: J3.8@160,1045 160,1007 171,996 313,996 364,945 421.97,945 448.71,918.26 465.48,918.26 U4.3@466.42,917.32
JTAG_TDO: J3.7 U4.4 | length 496.8
  Top Layer w6: J3.7@60,1045 58,1043 58,997 69.54,985.46 302.54,985.46 386,902 465.99,902 U4.4@466.42,901.57
JTAG_TMS: J3.11 U4.6 | length 390.4
  Top Layer w6: v1(439,866) 442.25,866 446.33,870.08 U4.6@466.42,870.08
  Bottom Layer w6: J3.11@160,945 152,937 152,908 164,896 321,896 371,846 404,846 424,866 v1(439,866)
MIPI_CLK_N: J1.15 R23.1 U4.44 | length 297.2
  Top Layer w4: U4.44@555,974.41 555,988.64 547,996.64 547,1011.73 554.74,1019.46 576.09,1019.46 578.56,1021.93 578.56,1025 576.09,1027.46 554.74,1027.46 543,1039.2 543,1084.73 556.27,1098 577.62,1098 579.96,1100.34 579.96,1103.66 577.62,1106 575.62,1106 R23.1@566.62,1115 ; R23.1@565,1115 R23.1@566.62,1115 ; J1.15@605.05,1155 605.05,1147.59 589,1131.54 589,1123 581,1115 R23.1@566.62,1115
MIPI_CLK_P: J1.14 R23.2 U4.43 | length 295.5
  Top Layer w4: U4.43@570.75,974.41 570.75,985.62 564.94,991.43 564.94,991.49 560.27,996.16 560.21,996.16 556,1000.36 556,1008 558.46,1010.46 579.82,1010.46 587.56,1018.2 587.56,1028.73 579.82,1036.46 558.46,1036.46 552,1042.93 552,1081 560,1089 581.35,1089 588.96,1096.62 588.96,1106.51 591.31,1108.85 598.85,1108.85 R23.2@605,1115 598,1122 598,1127.81 606.39,1136.2 611.72,1136.2 624.74,1149.23 J1.14@624.74,1155
MIPI_D0_N: J1.21 R24.1 U4.47 | length 323.5
  Top Layer w4: J1.21@486.94,1155 486.94,1161.33 474.48,1173.8 460.6,1173.8 449.49,1162.69 449.49,1121.74 451.83,1119.4 460.59,1119.4 R24.1@464.99,1115 461.49,1111.5 452.5,1111.5 449,1108 449,1095 468,1076 468,1054.86 468,1050.86 468,1042.86 468,1041.73 470.83,1038.9 474.79,1034.94 478.18,1034.94 482.77,1039.53 486.17,1039.53 488.43,1037.27 488.43,1033.87 483.84,1029.28 483.84,1025.89 486.1,1023.63 489.5,1023.63 494.09,1028.22 497.48,1028.22 499.74,1025.95 499.74,1022.56 495.15,1017.97 495.15,1014.58 503.86,1005.86 504.38,1005.35 504.38,989.59 507.76,986.22 U4.47@507.76,974.41